# Altium PCB RX5808_BUT.PcbDoc
Units mm, origin at the board's own origin, x right, y up, seen from the top; angles counter-clockwise.
Board outline 42.51 x 28.01 mm, 2 copper layers (Top Layer, Bottom Layer); 13 components, 19 nets, 84 pads, 136 vias.
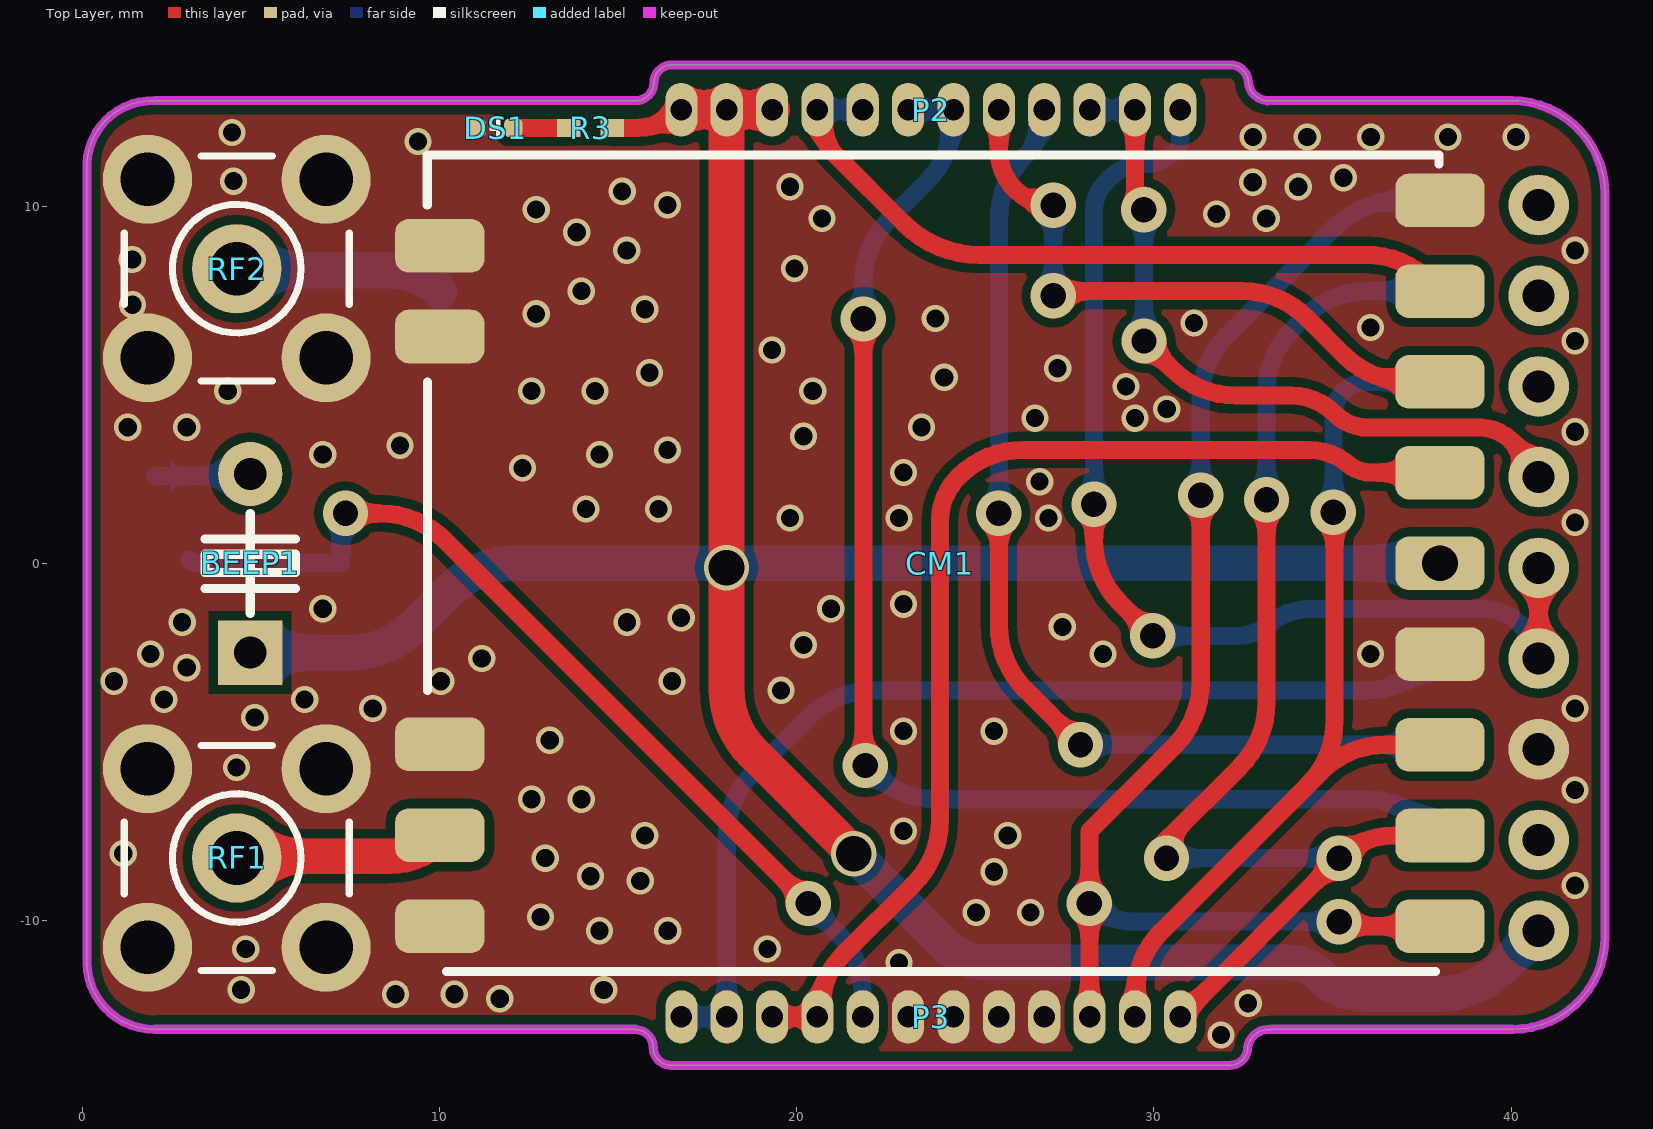
[diagram p0: Top Layer view]
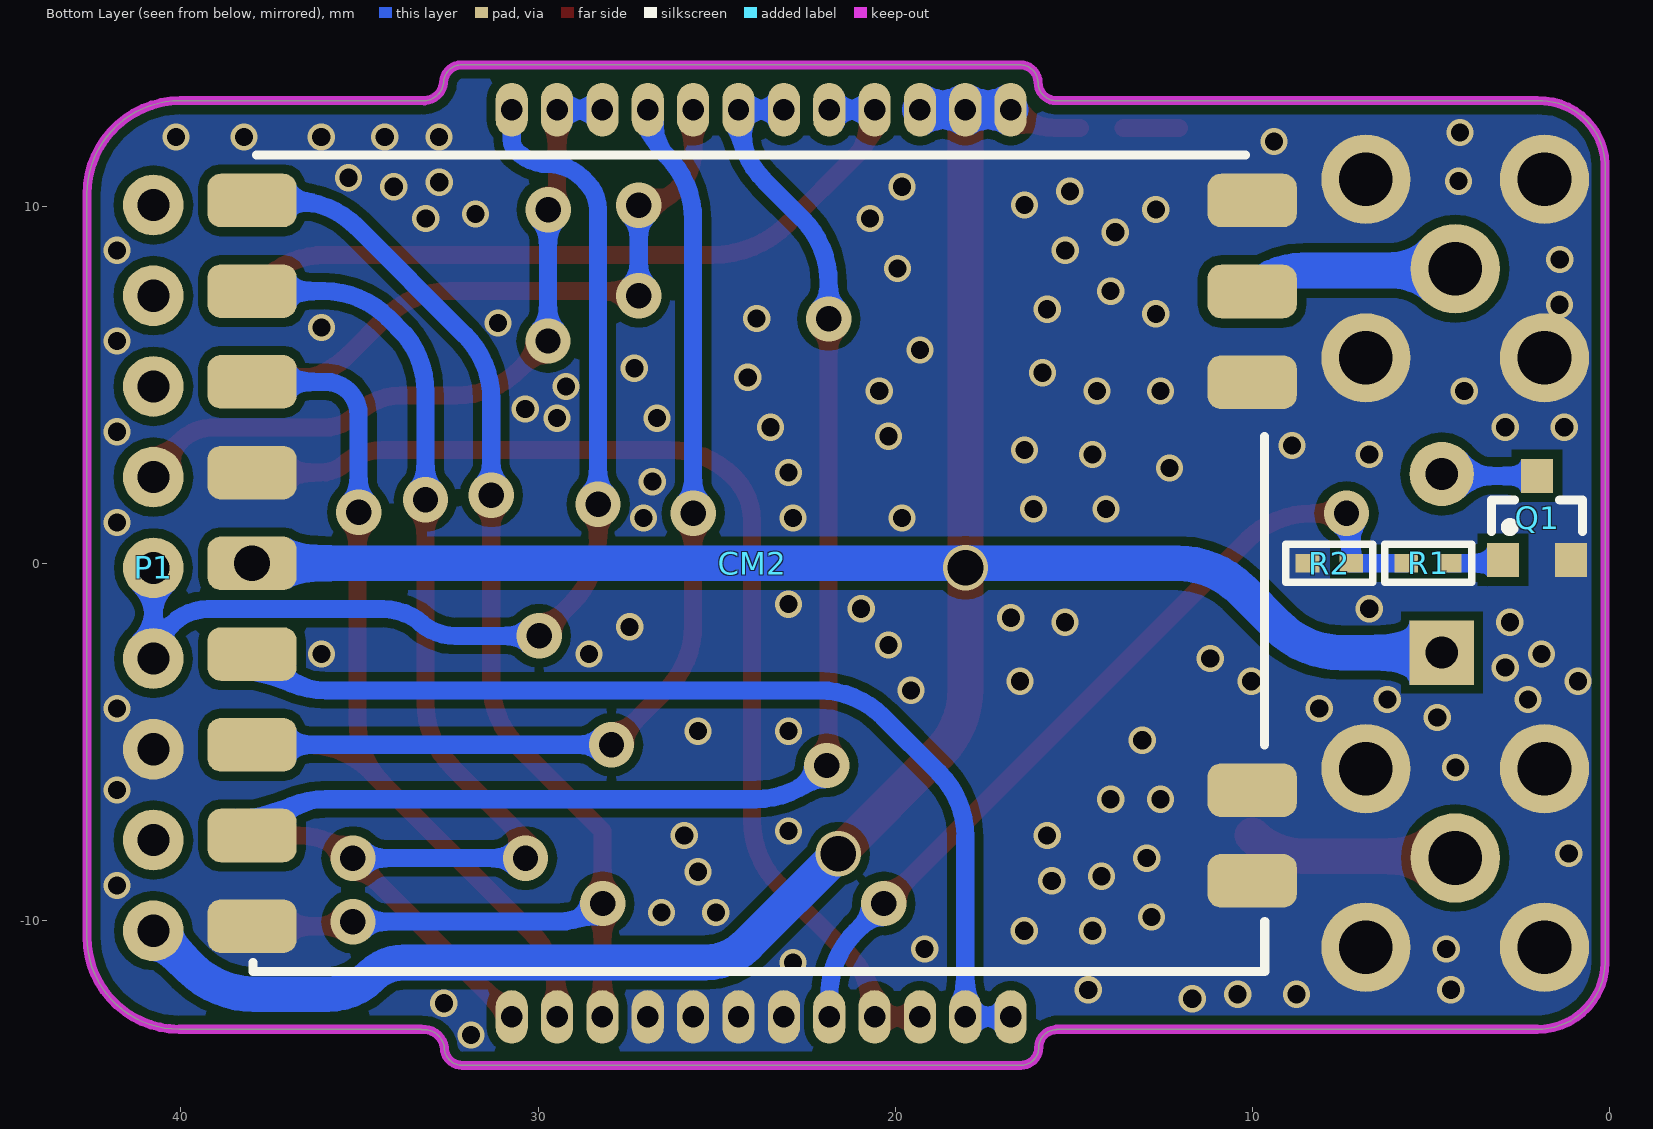
[diagram p1: Bottom Layer view, seen from below]

## Layer stack, top to bottom
Top Solder: solder mask 0.0102, Solder Resist, Dk 3.5
Top Layer: signal copper 0.0356
Dielectric 1: dielectric 0.32, FR-4, Dk 4.8
Bottom Layer: signal copper 0.0356
Bottom Solder: solder mask 0.0102, Solder Resist, Dk 3.5

## Board outline
0.127,-11.176 ccw(c2.014,-11.158) 2.032,-13.046 15.494,-13.046 15.476,-13.056 cw(c15.476,-13.564) 15.984,-13.564 ccw(c16.484,-13.556) 16.492,-14.056 32.118,-14.056 ccw(c32.126,-13.556) 32.626,-13.564 cw(c33.197,-13.627) 33.261,-13.056 33.279,-13.046 40.045,-13.046 ccw(c40.045,-10.459) 42.632,-10.459 42.632,10.332 ccw(c40.01,10.332) 40.01,12.954 33.279,12.954 cw(c33.216,13.526) 32.644,13.462 ccw(c32.144,13.454) 32.136,13.954 16.51,13.954 ccw(c16.502,13.454) 16.002,13.462 cw(c15.494,13.462) 15.494,12.954 2.032,12.954 ccw(c1.968,11.113) 0.127,11.176

## Design rules (kind name [scope] priority, off if disabled: settings)
Clearance [All] p1: gap=0.254 ignorepadtopadclearanceinfootprint=FALSE except(0: Arc-Hole Track-Hole SMDPad-Hole THPad-Hole Via-Hole Fill-Hole Poly-Hole Region-Hole Text-Hole)
ComponentClearance [All] p1: gap=0 collisioncheckmode=3 verticalgap=0 showdistances=FALSE
PolygonConnect [All] p1: connectstyle=Direct reliefconductorwidth=0.254 reliefentries=4 polygonreliefangle="90 Angle" airgapwidth=0.254
RoutingVias [All] p1: holewidth=0.711 width=1.27 viastyle="Through Hole" minholewidth=0.711 minwidth=1.27 maxholewidth=0.711 maxwidth=1.27
SolderMaskExpansion [All] p1: expansion=0.102 istentingtop=FALSE
Width [All] p1: maxlimit=10 minlimit=0.508 preferedwidth=0.508
29 further rules are at their usual default settings.

## Components (designator, comment, footprint, x,y, rotation, side; value= is the part's Value field where it differs from the comment)
BEEP1 "BELL" "BEEP 5x9x5.5" 4.699,0 r0 top locked
CM1 "RX5808" COMM-SMD_12P_RX5808 24.008,0.254 r0 top locked
CM2 "RX5808" COMM-SMD_12P_RX5808 24.008,-0.254 r0 bottom locked
DS1 "LED" 0402_LED 11.557,12.192 r180 top
P1 "Header 9" HDR-1X9 40.772,-10.287 r90 bottom locked
P2 "Header 12" HDR1.27-1x12-M 30.739,12.7 r180 top
P3 "Header 12" HDR1.27-1x12-M 30.739,-12.7 r180 top locked
Q1 "SS8050" SOT23A 2.032,1.143 r180 bottom
R1 "1K" 0402_RES 5.08,0 r180 bottom
R2 "10K" 0402_RES 7.849,0 r180 bottom
R3 "1K" 0402_RES 14.224,12.192 r180 top locked
RF1 "SMA-KE901" SMA-TH_SMA-KE901 4.323,-8.25 r0 top
RF2 "SMA-KE901" SMA-TH_SMA-KE901 4.323,8.25 r0 top

## Footprints (in the part's own frame and the unit in brackets; to place one, negate y for a bottom-side part, rotate by r counter-clockwise, add the part's x,y. Pads: shape width x height; smd on the part's side, far side on the other; paste and mask are expansions set on the pad)
0402_LED [mil]
  rrect50% 20x20 smd: 1(-20,0) 2(20,0)
  silkscreen extent -6,-10 6,10, body extent -20,-10 20,10, height 18
0402_RES [mil] "1/16W贴片电阻"
  rect 26x20 smd: 1(-24,0) 2(24,0)
  silkscreen extent -48,-21 48,21, body extent -20,-10 20,10, height 12
"BEEP 5x9x5.5" [mm] "5*9*5.5mm(脚距,直径,高度)"
  rect 1.8x1.8 hole 0.9: 1(0,-2.5)
  round 1.8 hole 0.9: 2(0,2.5)
  silkscreen extent -1.27,-1.4 1.27,1.4, body extent -4.5,-4.5 4.5,4.5, height 5.45
COMM-SMD_12P_RX5808 [mm]
  rrect50% 2.5x1.5 smd: 1(-14,-5.324) 2(-14,-7.864) 3(-14,-10.414) 4(14,-10.414) 5(14,-7.874) 6(14,-5.334) 7(14,-2.794) 8(14,-0.254) 9(14,2.286) 10(14,4.826) 11(14,7.366) 12(14,9.906) 13(-14,8.636) 14(-14,6.096)
  silkscreen extent -14.35,-11.68 13.97,11.18, body extent -14.48,-11.8 14.22,11.3, height 3.11
HDR1.27-1x12-M [mm]
  oval 0.9x1.5 hole 0.6: 1(0,0) 2(1.27,0) 3(2.54,0) 4(3.81,0) 5(5.08,0) 6(6.35,0) 7(7.62,0) 8(8.89,0) 9(10.16,0) 10(11.43,0) 11(12.7,0) 12(13.97,0)
  body extent -0.63,-0.9 14.61,0.9, height 4.26
HDR-1X9 [mm] "排针，9脚"
  round 1.7 hole 0.9: 1(0,0) 2(2.54,0) 3(5.08,0) 4(7.62,0) 5(10.16,0) 6(12.7,0) 7(15.24,0) 8(17.78,0) 9(20.32,0)
  body extent -1.27,-1.27 21.59,1.27, height 8.5
SMA-TH_SMA-KE901 [mm]
  round 2.5 hole 1.5: 1(-2.5,2.5) 2(2.5,2.5) 3(-2.5,-2.5) 4(2.5,-2.5) 5(0,0)
  silkscreen extent -3.15,-3.15 3.15,3.15, body extent -3.25,-3.3 3.25,3.2, height 12.5
SOT23A [mm]
  rect 0.9x0.95 smd: 1(-0.95,-1.048) 2(0.95,-1.048) 3(0,1.302)
  silkscreen extent -1.27,-0.25 1.27,0.64, body extent -1.46,-1.12 1.46,1.35, height 1

## Part data
BEEP1: library part Beep, "蜂鸣器"
P1: "Header, 9-Pin", LatestRevisionDate=17-Jul-2002, LatestRevisionNote="Re-released for DXP Platform.", Publisher="Altium Limited"
P2 P3: "Header, 12-Pin", LatestRevisionDate=17-Jul-2002, LatestRevisionNote="Re-released for DXP Platform.", Publisher="Altium Limited"
Q1: "NPN三极管"
R1 R2 R3: library part RES, "电阻"
RF1 RF2: BOM_JLCPCB Part Class="Extended Part", BOM_Manufacturer=DreamLNK, BOM_Manufacturer Part=SMA-KE901, BOM_Supplier=LCSC, BOM_Supplier Part=C914559, Contributor=LCSC, spicePre=R, spiceSymbolName=SMA-KE901

## Via types
v1: diameter 0.762, hole 0.508, Top Layer to Bottom Layer, tented both sides, 114 vias
v2: diameter 1.27, hole 0.711, Top Layer to Bottom Layer, tented both sides, 19 vias
v3: diameter 1.27, hole 1, Top Layer to Bottom Layer, tented both sides, 3 vias

## Nets (pads, with @x,y where several pads share a name; then routed paths per layer and width w, separated by ;. In a path a pad name is that pad's centre, name@x,y a point inside that pad or via, vN(x,y) a via of type N, cw(c..) or ccw(c..) an arc to the next point about the centre after c; other vN are vias at no path point)
5V: BEEP1.1 CM1.8 CM2.8 P1.1 P2.10 P2.11 P2.12 R3.1 | length 84.8
  Top Layer w0.508: R3.1 15.543,12.192 ccw(c15.543,13.926) P2.12
  Top Layer w1: P2.12 P2.11 P2.10 ; P2.11@18.053,12.682 ccw(c18.082,12.644) 18.034,12.644 v3(18.034,-0.127) 18.034,-3.515 ccw(c20.574,-3.515) 18.778,-5.311 v3(21.595,-8.128)
  Bottom Layer w1: BEEP1.1 7.497,-2.5 ccw(c7.497,0.04) 9.293,-1.756 10.305,-0.744 cw(c12.101,-2.54) 12.101,0 17.907,0 v3(18.034,-0.127) 18.161,0 v3(38.008,0) ; P2.12 P2.11 P2.10 ; v3(21.595,-8.128) 24.153,-10.686 ccw(c25.336,-9.503) 25.336,-11.176 33.756,-11.176 cw(c33.756,-12.477) 34.676,-11.557 ccw(c35.902,-10.331) 35.902,-12.065 37.942,-12.065 ccw(c37.942,-9.525) 39.738,-11.321 P1.1
ADC_RSSI0: CM1.9 P3.9 P3.10 | length 31.8
  Top Layer w0.508: P3.10 P3.9 cw(c23.044,-12.7) 21.214,-11.049 cw(c23.044,-12.7) 21.301,-10.957 23.264,-8.994 ccw(c21.468,-7.198) 24.008,-7.198 24.008,1.187 cw(c25.742,1.187) 24.516,2.413 24.534,2.431 cw(c26.33,0.635) 26.33,3.175 34.339,3.175 cw(c34.339,1.441) 35.351,2.849 ; CM1.9 36.097,2.54 cw(c36.097,3.595) 35.516,2.715 ; 35.351,2.849 ccw(c36.097,3.595) 35.516,2.715 ; 35.351,2.849 cw(c34.339,1.441) 35.516,2.715
ADC_RSSI1: CM2.9 P3.11 P3.12 | length 28.7
  Bottom Layer w0.508: P3.12 P3.11 18.039,-7.656 cw(c20.579,-7.656) 18.783,-5.86 20.343,-4.3 cw(c22.139,-6.096) 22.139,-3.556 35.94,-3.556 ccw(c35.94,-1.016) 37.736,-2.812 CM2.9
AUDIO: P1.4 P1.5 P2.1 | length 33.8
  Top Layer w0.508: v2(28.321,1.651) 28.321,0.671 ccw(c30.861,0.671) 29.065,-1.125 v2(29.972,-2.032) ; P1.4 P1.5
  Bottom Layer w0.508: v2(28.321,1.651) 28.326,1.656 28.326,9.901 cw(c29.407,9.901) 28.643,10.666 28.761,10.784 cw(c29.707,9.838) 29.707,11.176 ccw(c29.707,12.462) 30.616,11.553 ccw(c30.32,11.849) 30.739,11.849 P2.1 ; v2(29.972,-2.032) 32.315,-2.032 ccw(c32.315,-0.545) 33.165,-1.765 ; 33.152,-1.778 cw(c34.349,-2.975) 33.165,-1.765 ; P1.5 P1.4 ccw(c39.698,-2.667) 40.457,-1.907 40.255,-1.705 ccw(c39.234,-2.725) 39.234,-1.282 34.349,-1.282 ccw(c34.349,-2.975) 33.367,-1.596 ; 33.165,-1.765 cw(c34.349,-2.975) 33.367,-1.596 ; 33.165,-1.765 ccw(c32.315,-0.545) 33.367,-1.596
AUDIO0: CM1.10 P2.5 | length 17.8
  Top Layer w0.508: P2.5 25.659,11.552 ccw(c27.183,11.552) 26.169,10.414 ccw(c27.183,11.552) v2(27.183,10.028) ; v2(27.183,7.493) 27.31,7.62 32.481,7.62 cw(c32.481,5.08) 34.277,6.876 35.329,5.824 ccw(c37.125,7.62) 35.565,5.616 ccw(c37.125,7.62) 36.018,5.334 ccw(c37.125,7.62) 37.125,5.08 CM1.10
  Bottom Layer w0.508: v2(27.183,7.493) v2(27.183,10.028)
AUDIO1: CM2.10 P2.4 | length 29.1
  Top Layer w0.508: v2(25.659,1.397) 25.659,-1.742 ccw(c28.199,-1.742) 26.403,-3.538 v2(27.945,-5.08)
  Bottom Layer w0.508: v2(25.659,1.397) 25.659,9.621 cw(c28.199,9.621) 26.403,11.417 26.416,11.43 ccw(c25.177,12.669) 26.929,12.669 P2.4 ; v2(27.945,-5.08) 37.754,-5.08 37.881,-5.207 CM2.10
BEEP: P3.8 R1.1 R2.2 | length 24
  Top Layer w0.508: v2(7.366,1.397) 8.346,1.397 cw(c8.346,-1.143) 10.142,0.653 v2(20.32,-9.525)
  Bottom Layer w0.508: R1.1 R2.2 7.239,1.09 cw(c7.673,1.09) v2(7.366,1.397) ; v2(20.32,-9.525) 21.105,-10.31 cw(c19.309,-12.106) 21.83,-11.797 cw(c19.309,-12.106) 21.849,-12.106 P3.8
GND: CM1.1 CM1.3 CM1.7 CM1.12 CM1.13 CM1.14 CM2.1 CM2.3 CM2.7 CM2.12 CM2.13 CM2.14 DS1.2 P1.3 P3.4 P3.5 P3.6 P3.7 Q1.2 R2.1 RF1.1 RF1.2 RF1.3 RF1.4 RF2.1 RF2.2 RF2.3 RF2.4
  other v1: 31.877,-13.208 32.639,-12.319 11.684,-12.192 8.763,-12.065 10.414,-12.065 4.445,-11.938 14.596,-11.941 22.86,-11.176 4.572,-10.795 19.177,-10.795 14.478,-10.287 16.388,-10.287 12.827,-9.906 25.024,-9.779 26.543,-9.779 41.788,-9.017 15.621,-8.89 14.224,-8.763 25.527,-8.636 12.959,-8.255 1.143,-8.128 15.748,-7.62 25.908,-7.62 22.992,-7.493 12.573,-6.604 13.97,-6.604 41.788,-6.35 4.318,-5.715 13.086,-4.953 22.992,-4.699 25.527,-4.699 4.826,-4.318 8.128,-4.064 41.788,-4.064 2.286,-3.81 6.223,-3.81 19.558,-3.556 0.889,-3.302 10.033,-3.302 16.51,-3.302 2.921,-2.921 11.181,-2.667 1.905,-2.54 28.575,-2.54 36.068,-2.54 20.193,-2.286 27.437,-1.778 2.794,-1.651 15.245,-1.651 16.764,-1.524 6.731,-1.27 20.955,-1.27 22.987,-1.143 41.788,1.143 19.812,1.27 22.86,1.27 27.051,1.27 14.097,1.524 16.129,1.524 26.802,2.286 22.987,2.54 12.324,2.667 6.731,3.048 14.478,3.048 16.383,3.175 8.895,3.302 20.193,3.556 41.788,3.683 1.27,3.81 2.921,3.81 23.495,3.81 26.67,4.064 29.469,4.064 30.358,4.318 4.069,4.826 12.573,4.826 14.351,4.826 20.447,4.826 29.215,4.953 24.13,5.207 15.875,5.334 27.305,5.461 19.304,5.969 41.788,6.223 36.068,6.604 31.12,6.731 23.881,6.858 12.705,6.985 15.748,7.112 1.402,7.239 13.97,7.62 19.939,8.255 1.397,8.509 15.24,8.763 41.788,8.763 13.843,9.271 20.706,9.652 33.147,9.652 31.75,9.779 12.705,9.906 16.383,10.033 15.113,10.414 19.812,10.541 34.041,10.541 32.766,10.668 4.229,10.7 35.306,10.795 9.398,11.811 32.771,11.938 34.295,11.938 36.073,11.938 38.232,11.938 40.137,11.938 4.191,12.065
NetBEEP1_2: BEEP1.2 Q1.3 | length 2.7
  Bottom Layer w0.508: Q1.3 4.566,2.445 ccw(c4.566,2.633) BEEP1.2
NetCM1_2: CM1.2 RF1.5 | length 5.8
  Top Layer w1: RF1.5@4.323,-8.2 8.584,-8.2 ccw(c8.584,-6.186) CM1.2
NetCM2_2: CM2.2 RF2.5 | length 5.8
  Bottom Layer w1: RF2.5@4.323,8.2 8.584,8.2 cw(c8.584,6.186) CM2.2
NetDS1_1: DS1.1 R3.2 | length 1.5
  Top Layer w0.508: DS1.1 R3.2
NetQ1_1: Q1.1 R1.2 | length 1.5
  Bottom Layer w0.508: Q1.1 ccw(c3.211,0.324) 3.211,0 R1.2
SPI2_CS: CM1.5 CM2.5 P3.1 | length 34.6
  Top Layer w0.508: v2(30.353,-8.255) 30.353,-7.752 32.408,-5.697 ccw(c30.612,-3.901) 33.152,-3.901 v2(33.152,1.778) ; P3.1 v2(35.184,-8.255) cw(c36.717,-9.788) 36.717,-7.62 CM1.5
  Bottom Layer w0.508: v2(30.353,-8.255) v2(35.184,-8.255) ; v2(33.152,1.778) 33.152,4.79 cw(c35.692,4.79) 33.738,6.412 34.201,6.876 cw(c35.997,5.08) 35.997,7.62 CM2.5
SPI2_MOSI: CM1.4 CM2.4 P3.3 | length 37.9
  Top Layer w0.508: P3.3 28.197,-12.697 28.197,-9.528 v2(28.194,-9.525) 28.194,-7.498 30.567,-5.125 ccw(c28.771,-3.329) 31.311,-3.329 v2(31.311,1.905) ; v2(35.184,-10.033) 35.311,-10.16 CM1.4
  Bottom Layer w0.508: v2(28.194,-9.525) ccw(c29.42,-8.299) 28.336,-9.652 ccw(c29.42,-8.299) 29.42,-10.033 v2(35.184,-10.033) ; v2(31.311,1.905) 31.311,4.599 cw(c33.851,4.599) 32.054,6.395 35.075,9.416 cw(c36.871,7.62) 36.871,10.16 CM2.4
SPI2_SCK: CM1.6 CM2.6 P3.2 | length 26.5
  Top Layer w0.508: P3.2 29.469,-12.101 cw(c32.009,-12.101) 30.213,-10.305 34.314,-6.204 ; v2(35.025,1.429) 35.057,1.397 35.057,-4.409 cw(c32.517,-4.409) 34.314,-6.204 ; CM1.6 36.49,-5.08 ccw(c36.49,-7.62) 34.694,-5.824 34.314,-6.204
  Bottom Layer w0.508: v2(35.025,1.429) 35.025,4.156 cw(c35.952,4.156) 35.296,4.811 ; 35.297,4.812 cw(c35.946,4.16) 35.946,5.08 CM2.6
VIDEO: P1.6 P2.2 P2.3 | length 20.4
  Top Layer w0.508: P2.3 P2.3@28.295,12.604 ; P2.2 29.469,10.531 ccw(c30.336,10.531) 29.722,9.919 29.722,9.905 v2(29.721,9.903) ; v2(29.723,6.223) 30.503,5.443 ccw(c32.299,7.239) 32.299,4.699 33.831,4.699 cw(c33.831,2.965) 35.057,4.191 ccw(c36.006,5.14) 36.006,3.798 39.133,3.798 cw(c39.133,2.915) 39.157,3.798 cw(c39.129,2.575) 39.993,3.44 40.596,2.837 cw(c40.173,2.413) P1.6
  Bottom Layer w0.508: P2.3 P2.2 ; v2(29.721,9.903) 29.723,9.901 v2(29.723,6.223)
VIDEO0: CM1.11 P2.8 P2.9 | length 20.9
  Top Layer w0.508: P2.9 ccw(c22.419,12.7) 21.118,11.399 23.01,9.507 ccw(c25.113,11.61) 25.113,8.636 35.94,8.636 cw(c35.94,6.096) 37.736,7.892 CM1.11
  Bottom Layer w0.508: P2.9 P2.8
VIDEO1: CM2.11 P2.6 P2.7 | length 37.2
  Top Layer w0.508: v2(21.865,6.842) 21.865,-5.604 v2(21.92,-5.659)
  Bottom Layer w0.508: v2@21.849,6.858 v2(21.865,6.842) 21.865,7.859 cw(c24.405,7.859) 22.609,9.655 23.645,10.691 ccw(c21.849,12.487) 24.389,12.487 P2.6 P2.7 ; v2(21.92,-5.659) 22.121,-5.86 ccw(c23.917,-4.064) 23.917,-6.604 35.94,-6.604 cw(c35.94,-9.144) 37.736,-7.348 CM2.11
pads on no net: P1.2 P1.7 P1.8 P1.9

## Polygon pours and split planes (outlines as drawn)
GND on Bottom Layer "GND_L02_P001" (solid, remove dead copper, pour order 1): 0.083,-14.328 0.083,14.499 42.589,14.499 42.589,-14.12
GND on Top Layer "GND_L01_P000" (solid, remove dead copper, pour order 0): 0.254,-13.954 0.254,13.97 42.759,13.97 42.538,-14.046

## Keep-outs
Keep-Out Layer:
  lines w0.254: 15.476,-13.056 cw(c15.476,-13.564) 15.984,-13.564 ccw(c16.484,-13.556) 16.492,-14.056 32.118,-14.056 ccw(c32.126,-13.556) 32.626,-13.564 cw(c33.197,-13.627) 33.261,-13.056 ; 15.494,-13.046 2.032,-13.046 cw(c2.014,-11.158) 0.127,-11.176 0.127,0 0.127,11.176 cw(c1.968,11.112) 2.032,12.954 15.494,12.954 ccw(c15.494,13.462) 16.002,13.462 cw(c16.502,13.454) 16.51,13.954 32.136,13.954 cw(c32.144,13.454) 32.644,13.462 ccw(c33.216,13.525) 33.279,12.954 40.01,12.954 cw(c40.01,10.332) 42.632,10.332 42.632,-10.459 cw(c40.045,-10.459) 40.045,-13.046 33.279,-13.046

## Silkscreen, mask and mechanical layers (free items; w line width, h text height)
Top Overlay:
  lines w0.254: 4.699,-1.397 4.699,0.812